# Altium PCB PELT_DRIVE.PcbDoc (part 2 of 2)
Units mm, origin at the board's own origin, x right, y up, seen from the top; angles counter-clockwise.
Board outline 100 x 36 mm, 2 copper layers (Top Layer, Bottom Layer), stack 1.071 mm thick; 61 components, 46 nets, 221 pads, 71 vias.
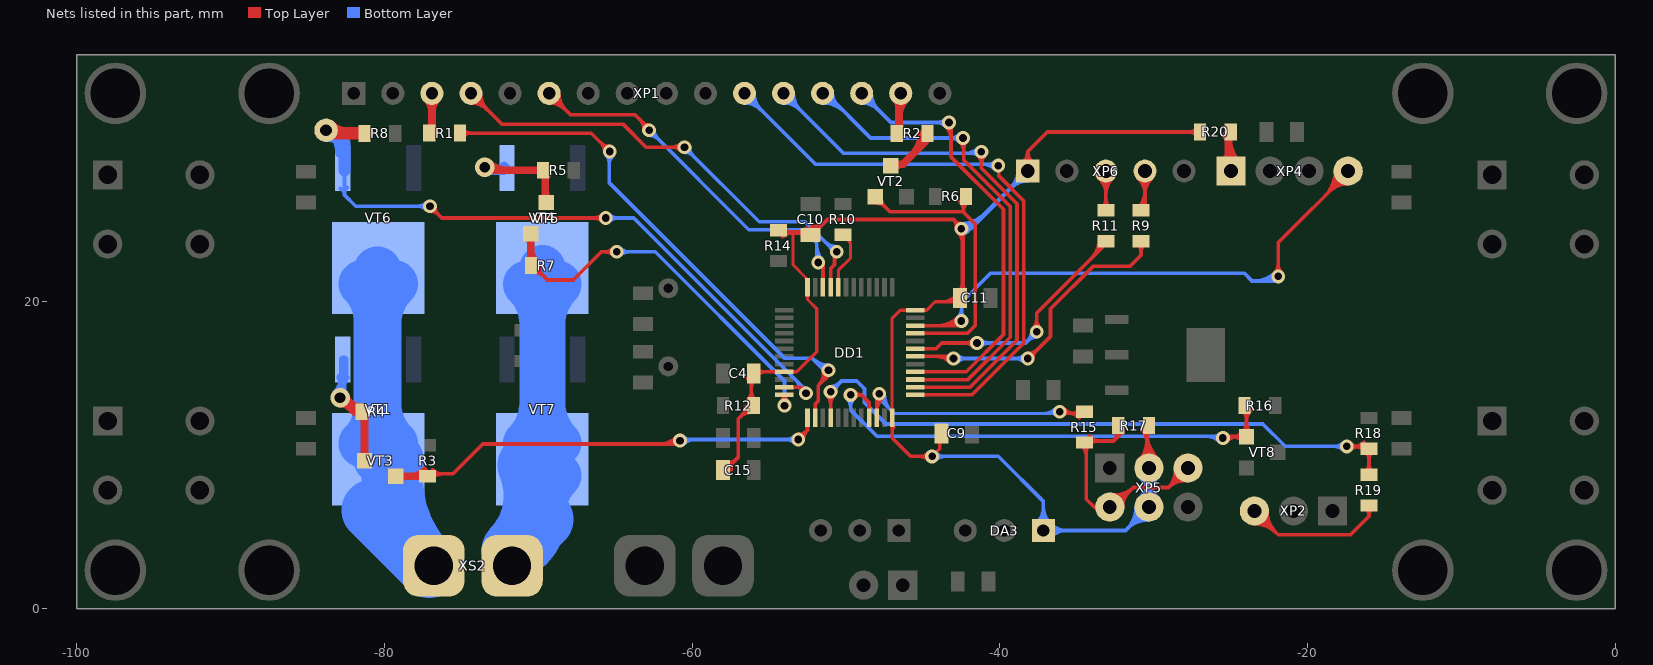
[diagram p2: the nets of this part, all layers, seen from the top]

## Via types
v1: diameter 0.9, hole 0.5, Top Layer to Bottom Layer, tented both sides, 65 vias
v2: diameter 1.27, hole 0.7, Top Layer to Bottom Layer, tented both sides, 5 vias
v3: diameter 2.6, hole 2, Top Layer to Bottom Layer, tented both sides, 1 vias

## Nets (pads, with @x,y where several pads share a name; then routed paths per layer and width w, separated by ;. In a path a pad name is that pad's centre, name@x,y a point inside that pad or via, vN(x,y) a via of type N, cw(c..) or ccw(c..) an arc to the next point about the centre after c; other vN are vias at no path point) (continued)
NetDD1_11: DD1.11 pad.0@-83.8,31.1 R8.1 VT6.1 | length 57.8
  Top Layer w0.24: v1@-77.046,25.832 cw(c-77.046,25.035) -76.483,25.599 cw(c-75.919,26.162) v1@-76.716,26.162 ; v1(-77.046,26.162) -76.284,25.4 -65.87,25.4 -65.616,25.654 v1(-65.616,25.4) ; v1@-65.849,25.167 ccw(c-66.413,24.603) -66.413,25.4 ccw(c-66.413,26.197) v1@-65.849,25.633 ; DD1.11@-54,14.4 -53,14.4 ; v1@-52.918,14.088 ccw(c-53.226,14.174) -53,14.4 ; v1@-52.688,14.318 cw(c-52.774,14.626) -53,14.4 ; v1(-52.6,14) -53,14.4
  Top Layer w0.8: pad.0@-83.6,30.9 R8.1@-81.15,30.9 ; pad.0@-83.544,31.356 ccw(c-82.443,32.457) -82.443,30.9
  Bottom Layer w0.24: VT6.1@-82.871,27.308 cw(c-83.07,26.882) -82.6,26.882 ; -82.6,27 cw(c-82.058,27) VT6.1@-82.441,27.383 ; VT6.1@-82.6,28.5 -82.6,26.89 -81.872,26.162 v1(-77.046,26.162) ; v1@-77.279,25.929 ccw(c-77.843,25.365) -77.843,26.162 ccw(c-77.843,26.959) v1@-77.279,26.395 ; v1(-65.616,25.4) -63.8,25.4 -52.6,14.2 v1(-52.6,14) ; v1@-65.383,25.167 cw(c-64.819,24.603) -64.819,25.4 cw(c-64.819,26.197) v1@-65.383,25.633 ; -53.305,14.905 cw(c-54.21,14) v1@-52.93,14 ; -52.895,14.495 cw(c-53.39,14) v1@-52.69,14 ; -52.822,14.422 ccw(c-52.6,14.644) v1@-52.6,14.33
  Bottom Layer w0.8: pad.0@-83.8,31.1 pad.0@-83.4,31.1 ; pad.0@-83.775,30.739 cw(c-83.669,29.232) -82.6,30.3 ; VT6.1@-82.81,29.653 ccw(c-84.825,29.675) pad.0@-83.4,31.1 ; VT6.1@-82.781,29.723 ccw(c-83.217,30.159) -82.6,30.159 ; VT6.1@-82.6,28.5 -82.6,30.3 pad.0@-83.4,31.1
NetDD1_12: DD1.12 R7.2 VT5.1 | length 32.9
  Top Layer w0.24: R7.2@-70.334,21.87 cw(c-70.334,20.832) -69.6,21.566 ; R7.2@-70.334,22.3 -69.404,21.37 -67.73,21.37 -65.9,23.2 v1(-64.9,23.2) ; -69.954,22.25 ccw(c-69.157,22.25) -69.721,21.687 ; v1@-65.133,22.967 ccw(c-65.697,22.403) -65.697,23.2 ccw(c-65.697,23.997) v1@-65.133,23.433 ; v1@-54.21,13.455 ccw(c-54.577,13.9) DD1.12@-54,13.9 ; v1(-54,13.2) DD1.12@-54,13.9 ; v1@-53.79,13.455 cw(c-53.423,13.9) DD1.12@-54,13.9
  Top Layer w0.5: VT5.1@-70.677,24.191 cw(c-71.104,23.764) -70.5,23.764 cw(c-69.896,23.764) VT5.1@-70.323,24.191 ; R7.2@-70.5,22.466 VT5.1@-70.5,24.368 ; -70.5,23.354 ccw(c-69.33,23.354) R7.2@-70.157,22.527
  Bottom Layer w0.24: v1@-64.667,22.967 cw(c-64.103,22.403) -64.103,23.2 cw(c-64.103,23.997) v1@-64.667,23.433 ; v1@-64.6,23.2 -62.4,23.2 -54,14.8 v1(-54,13.2) ; v1@-54.233,13.433 ccw(c-54.797,13.997) -54,13.997 ccw(c-53.203,13.997) v1@-53.767,13.433
NetDD1_13: DD1.13 R3.1 VT3.1 | length 37.6
  Top Layer w0.24: R3.1@-77.2,8.766 -75.549,8.766 -73.615,10.7 -61.09,10.7 v1@-60.79,11 ; R3.1@-76.881,8.497 cw(c-76.233,7.849) -76.233,8.766 cw(c-76.233,9.683) -76.881,9.035 ; -62.123,10.7 ccw(c-62.123,12.255) v1@-61.023,11.155 ; -61.543,10.7 ccw(c-61.543,11.675) v1@-60.854,10.986 ; v1(-53.1,11) -52.5,11.6 DD1.13@-52.5,12.4 ; v1@-53.1,11.33 ccw(c-53.1,12.127) -52.537,11.563 ccw(c-51.973,11) v1@-52.77,11
  Top Layer w0.5: VT3.1@-79.268,8.6 R3.1@-77.366,8.6 ; VT3.1@-79.091,8.423 cw(c-78.664,7.996) -78.664,8.6 cw(c-78.664,9.204) VT3.1@-79.091,8.777 ; -78.254,8.6 ccw(c-78.254,9.77) R3.1@-77.427,8.943
  Bottom Layer w0.24: v1@-60.79,11 v1(-53.1,11) ; v1@-60.557,10.689 cw(c-59.805,9.937) -59.805,11 ; v1@-60.557,11.155 ccw(c-60.182,11.53) -60.182,11 ; v1@-53.333,10.767 ccw(c-53.897,10.203) -53.897,11 ccw(c-53.897,11.797) v1@-53.333,11.233
  other v1: -60.79,10.922
NetDD1_14: DD1.14 R1.1 | length 42.5
  Top Layer w0.24: R1.1@-75.25,30.91 -66.554,30.91 v1(-65.362,29.718) v1@-65.282,29.718 ; R1.1@-74.981,30.641 cw(c-74.333,29.993) -74.333,30.91 cw(c-74.333,31.827) R1.1@-74.981,31.179 ; v1@-65.692,29.718 ccw(c-66.489,29.718) -65.925,30.281 ccw(c-65.362,30.845) v1@-65.362,30.048 ; DD1.14@-52,12.4 -52,13.3 -51.8,13.5 -51.8,14.5 -51.138,15.162 v1(-51.138,15.494) ; -51.8,14.5 ccw(c-52.625,15.325) v1@-51.466,15.457 ; -51.448,14.852 ccw(c-51.993,15.397) v1@-51.227,15.484
  Bottom Layer w0.24: v1@-65.595,29.485 cw(c-66.067,29.013) -65.4,29.013 ; -65.4,28.83 cw(c-64.474,28.83) v1@-65.129,29.485 ; v1(-65.362,29.718) -65.4,29.68 -65.4,27.7 -53.97,16.27 -52.17,16.27 v1@-51.39,15.49 ; -52.138,16.238 ccw(c-51.138,17.239) v1@-51.138,15.824 ; -51.729,15.829 ccw(c-51.138,16.419) v1@-51.138,15.584
NetDD1_21: DD1.21 R16.1 VT8.1 | length 42.6
  Top Layer w0.24: v1(-49.7,13.9) -49,13.9 ; v1@-49.445,13.69 cw(c-49,13.323) -49,13.9 ; v1@-49.445,14.11 ccw(c-49,14.477) -49,13.9 ; DD1.21@-48.5,12.4 -48.5,13.4 -49,13.9 ; v1@-25.5,11.2 -25.5,10.938 -25.238,11.2 -23.984,11.2 VT8.1@-23.96,11.176 -23.96,13.12 R16.1@-24.048,13.208 ; v1@-25.436,11.036 cw(c-25.041,10.641) -25.041,11.2 ; v1@-25.267,10.867 cw(c-24.462,10.062) -24.462,11.2 ; v1@-25.267,11.333 ccw(c-24.945,11.655) -24.945,11.2 ; -24.935,11.2 cw(c-24.935,10.201) VT8.1@-24.229,10.907 ; -24.819,11.2 ccw(c-24.819,12.035) -24.229,11.445 ccw(c-24.877,12.093) -23.96,12.093 ccw(c-23.043,12.093) VT8.1@-23.691,11.445 ; R16.1@-24.219,12.881 cw(c-24.843,12.257) -23.96,12.257 ; -23.96,12.208 cw(c-23.008,12.208) -23.681,12.881
  Bottom Layer w0.24: v1@-49.933,13.667 cw(c-50.497,13.103) -49.7,13.103 cw(c-48.903,13.103) v1@-49.467,13.667 ; v1(-49.7,13.9) -49.7,12.922 -47.978,11.2 -25.762,11.2 -25.5,10.938 v1@-25.5,11.2 ; -26.538,11.2 cw(c-26.538,10.062) v1@-25.733,10.867 ; -26.055,11.2 ccw(c-26.055,11.655) v1@-25.733,11.333 ; -25.959,11.2 cw(c-25.959,10.641) v1@-25.564,11.036
  other v1: -25.5,11.1
NetDD1_22: DD1.22 R15.2 | length 26.9
  Top Layer w0.2: v1@-48.084,13.723 cw(c-48.285,13.521) -48,13.521 ; DD1.22@-48,12.4 -48,13.806 v1(-47.836,13.97) ; DD1.22@-48,12.729 cw(c-46.595,12.729) v1@-47.589,13.723 ; -48,13.212 cw(c-47.078,13.212) v1@-47.73,13.864 ; v1(-36.1,12.8) -36.1,12.752 -36.152,12.7 -34.54,12.7 R15.2@-34.374,12.534 ; v1@-35.994,12.906 ccw(c-35.496,13.404) -35.496,12.7 ccw(c-35.496,12.196) v1@-35.853,12.553 ; v1@-35.853,13.047 ccw(c-35.014,13.886) R15.2@-35.014,12.7 ; -35.636,12.7 cw(c-35.636,11.564) -34.833,12.367 ; -35.395,12.7 ccw(c-35.395,13.495) R15.2@-34.833,12.933 ; -35.154,12.7 cw(c-35.154,12.046) R15.2@-34.691,12.509
  Bottom Layer w0.2: v1@-47.886,13.97 ccw(c-47.2,13.97) -47.685,13.485 ; v1(-47.836,13.97) -47.836,13.964 -48,13.8 -46.9,12.7 -36.152,12.7 -36.1,12.752 v1(-36.1,12.8) ; v1@-47.686,13.97 ccw(c-46.518,13.97) -47.344,13.144 ; v1@-47.486,13.97 ccw(c-45.835,13.97) -47.002,12.802 ; -37.186,12.7 ccw(c-37.186,13.886) v1@-36.348,13.047 ; v1@-36.348,12.553 ccw(c-36.704,12.196) -36.704,12.7 ccw(c-36.704,13.404) v1@-36.206,12.906
NetDD1_25: DD1.25 XP1.11 | length 44.6
  Top Layer w0.24: DD1.25@-45.5,13.9 -41.81,13.9 -38.438,17.272 -38.438,26.505 -40.06,28.127 v1@-40.06,28.7
  Bottom Layer w0.24: XP1.11@-56.6,32.87 cw(c-56.6,31.349) -55.525,32.424 cw(c-54.449,33.5) XP1.11@-55.97,33.5 ; XP1.11@-56.6,33.11 cw(c-56.6,32.168) -55.934,32.834 cw(c-55.268,33.5) XP1.11@-56.21,33.5 ; XP1.11@-56.6,33.5 -52,28.9 -40.2,28.9 v1(-40.1,28.8) ; -41.138,28.9 cw(c-41.138,27.762) v1@-40.333,28.567 ; -40.655,28.9 ccw(c-40.655,29.355) v1@-40.333,29.033 ; -40.559,28.9 cw(c-40.559,28.341) v1@-40.164,28.736
NetDD1_26: DD1.26 XP1.12 | length 42.4
  Top Layer w0.24: DD1.26@-45.5,14.4 -41.932,14.4 -38.878,17.454 -38.878,26.322 -41.2,28.644 v1(-41.2,29.7) ; v1@-41.433,29.467 cw(c-41.997,28.903) -41.2,28.903 cw(c-40.403,28.903) v1@-40.967,29.467
  Bottom Layer w0.24: XP1.12@-54.06,32.87 cw(c-54.06,31.349) -52.985,32.424 cw(c-51.909,33.5) XP1.12@-53.43,33.5 ; XP1.12@-54.06,33.11 cw(c-54.06,32.168) -53.394,32.834 cw(c-52.728,33.5) XP1.12@-53.67,33.5 ; XP1.12@-54.06,33.5 -50.16,29.6 -41.3,29.6 v1(-41.2,29.7) ; -42.238,29.6 ccw(c-42.238,30.738) v1@-41.433,29.933 ; -41.755,29.6 cw(c-41.755,29.145) v1@-41.433,29.467 ; -41.659,29.6 ccw(c-41.659,30.159) v1@-41.264,29.764
NetDD1_27: DD1.27 XP1.13 | length 38.9
  Top Layer w0.24: DD1.27@-45.5,14.9 -45.49,14.89 -42.065,14.89 -39.318,17.636 -39.318,26.14 -42.339,29.161 -42.339,30.539 v1(-42.4,30.6) ; v1@-42.633,30.367 cw(c-43.344,29.656) -42.339,29.656 ; -42.339,29.951 cw(c-41.751,29.951) v1@-42.167,30.367
  Bottom Layer w0.24: XP1.13@-51.52,32.87 cw(c-51.52,30.818) -50.069,32.269 ; XP1.13@-51.52,33.11 cw(c-51.52,31.637) -50.479,32.679 ; XP1.13@-51.52,33.35 cw(c-51.52,32.457) -50.888,33.088 ; XP1.13@-51.52,33.5 -51.3,33.5 -48.4,30.6 -42.7,30.6 -42.5,30.8 -42.4,30.7 v1(-42.4,30.6) ; XP1.13@-50.89,33.5 ccw(c-49.9,33.5) -50.6,32.8 ; v1@-42.633,30.367 ccw(c-43.197,29.803) -43.197,30.6 ccw(c-43.197,31.397) v1@-42.633,30.833
NetDD1_28: DD1.28 XP1.14 | length 35.3
  Top Layer w0.24: DD1.28@-45.5,15.4 -42.177,15.4 -39.758,17.819 -39.758,25.958 -43.17,29.37 -43.17,31.47 v1(-43.3,31.6) ; v1@-43.533,31.367 cw(c-44.411,30.489) -43.17,30.489 ; v1@-43.364,31.536 cw(c-43.831,31.069) -43.17,31.069 ; -43.17,31.117 cw(c-42.817,31.117) v1@-43.067,31.367
  Bottom Layer w0.24: XP1.14@-48.98,32.87 cw(c-48.98,31.349) -47.905,32.424 cw(c-46.829,33.5) XP1.14@-48.35,33.5 ; XP1.14@-48.98,33.11 cw(c-48.98,32.168) -48.314,32.834 cw(c-47.648,33.5) XP1.14@-48.59,33.5 ; XP1.14@-48.98,33.5 -47.08,31.6 v1(-43.3,31.6) ; v1@-43.533,31.367 ccw(c-44.097,30.803) -44.097,31.6 ccw(c-44.097,32.397) v1@-43.533,31.833
NetDD1_30: DD1.30 R9.2 | length 27
  Top Layer w0.24: DD1.30@-45.5,16.4 -43.4,16.4 -43.1,16.1 -43.01,16.19 v1(-43.01,16.256) ; -44.154,16.4 cw(c-44.154,15.112) v1@-43.243,16.023 ; -43.575,16.4 cw(c-43.575,15.691) v1@-43.074,16.192 ; -43.459,16.4 ccw(c-43.459,16.705) v1@-43.243,16.489 ; v1(-38.184,16.256) -38.144,16.256 -36.7,17.7 -36.7,19.5 -33.95,22.25 -31.55,22.25 -30.818,22.982 R9.2@-30.818,24.042 ; v1@-38.184,16.586 ccw(c-38.184,17.479) -37.552,16.848 ; v1@-37.854,16.256 cw(c-37.154,16.256) -37.649,16.751 ; R9.2@-31.087,23.773 cw(c-31.735,23.125) -30.818,23.125 cw(c-29.901,23.125) R9.2@-30.549,23.773
  Bottom Layer w0.24: v1@-43.1,16.1 -42.944,16.256 v1(-38.184,16.256) ; v1@-43.01,16.19 v1(-43.01,16.256) ; v1@-42.777,16.023 cw(c-42.213,15.459) -42.213,16.256 cw(c-42.213,17.053) v1@-42.777,16.489 ; v1@-38.417,16.023 ccw(c-38.981,15.459) -38.981,16.256 ccw(c-38.981,17.053) v1@-38.417,16.489
NetDD1_31: DD1.31 R11.2 | length 24.4
  Top Layer w0.24: DD1.31@-45.5,16.9 -44.144,16.9 -43.772,17.272 v1(-41.486,17.272) v1@-41.74,17.018 ; v1@-41.719,17.039 ccw(c-42.283,16.475) -42.283,17.272 ccw(c-42.283,18.069) v1@-41.719,17.505 ; v1@-37.833,18.233 ccw(c-38.397,18.797) -37.6,18.797 ccw(c-36.803,18.797) v1@-37.367,18.233 ; v1(-37.6,18) -37.6,19.222 -33.104,23.718 R11.2@-33.104,24.042 ; -34.067,22.755 ccw(c-35.354,24.042) R11.2@-33.534,24.042 ; -33.657,23.165 ccw(c-34.534,24.042) R11.2@-33.294,24.042
  Bottom Layer w0.24: v1@-41.74,17.018 v1(-41.486,17.272) -38.328,17.272 v1(-37.6,18) ; v1@-41.253,17.039 cw(c-40.689,16.475) -40.689,17.272 cw(c-40.689,18.069) v1@-41.253,17.505 ; v1@-37.93,18 cw(c-38.727,18) -38.163,17.437 cw(c-37.6,16.873) v1@-37.6,17.67
NetDD1_33: DD1.33 R6.2 VT2.1 | length 21.9
  Top Layer w0.24: VT2.1@-48.1,26.388 cw(c-48.1,25.471) -47.451,26.119 cw(c-46.803,26.768) VT2.1@-47.72,26.768 ; VT2.1@-48.1,26.768 -47.132,25.8 -42.35,25.8 ; DD1.33@-45.5,17.9 -42.1,17.9 -41.6,18.4 -41.6,25.006 -42.35,25.756 R6.2@-42.35,26.8 ; -42.619,26.481 cw(c-43.267,25.833) -42.35,25.833 cw(c-41.433,25.833) R6.2@-42.081,26.481
NetDD1_34: DD1.34 XP4.4 | length 49.6
  Top Layer w0.24: DD1.34@-45.5,18.4 -42.9,18.4 ; -44.021,18.4 ccw(c-44.021,20.221) v1@-42.733,18.933 ; -43.442,18.4 ccw(c-43.442,19.642) v1@-42.564,18.764 ; -42.862,18.4 ccw(c-42.862,19.062) v1@-42.394,18.594 ; v1@-42.825,18.641 cw(c-43.092,18.592) -42.9,18.4 ; v1@-42.68,18.423 ccw(c-42.776,18.275) -42.9,18.4 ; v1(-42.5,18.7) -42.6,18.7 -42.9,18.4 ; v1@-22.133,21.833 ccw(c-22.697,22.397) -21.9,22.397 ccw(c-21.103,22.397) v1@-21.667,21.833 ; v1(-21.9,21.6) -21.9,23.8 -17.356,28.344 XP4.4@-17.356,28.448 ; -18.846,26.854 ccw(c-20.441,28.448) XP4.4@-18.186,28.448 ; -18.595,27.105 cw(c-17.356,25.865) XP4.4@-17.356,27.618 ; -18.437,27.263 ccw(c-19.621,28.448) XP4.4@-17.946,28.448 ; -18.186,27.514 cw(c-17.356,26.685) XP4.4@-17.356,27.858 ; -18.027,27.673 ccw(c-18.802,28.448) XP4.4@-17.706,28.448
  Bottom Layer w0.24: v1@-42.71,18.955 ccw(c-43.077,19.4) -42.5,19.4 ; v1(-42.5,18.7) -42.5,19.4 ; v1@-42.29,18.955 cw(c-41.923,19.4) -42.5,19.4 ; -23.421,21.3 ccw(c-23.421,23.121) v1@-22.133,21.833 ; -22.842,21.3 ccw(c-22.842,22.542) v1@-21.964,21.664 ; -22.262,21.3 ccw(c-22.262,21.962) v1@-21.794,21.494 ; v1(-21.9,21.6) -22.2,21.3 -23.6,21.3 -24.1,21.8 -40.6,21.8 -42.481,19.919 -42.481,19.419 -42.5,19.4
NetDD1_44: DD1.44 R10.1 | length 5.3
  Top Layer w0.2: DD1.44@-50.5,20.9 -50.5,21.994 -49.7,22.794 -49.7,23.761 ; R10.1@-50.2,24.45 -49.85,24.45 -49.8,24.5 -49.8,23.861 ; R10.1@-49.827,24.214 ccw(c-49.608,24.053) -49.8,23.861 ; R10.1@-49.789,24.278 ccw(c-49.379,24.082) -49.7,23.761 ; -49.8,23.861 -49.7,23.761
NetDD1_45: DD1.45 XP1.4 | length 38.4
  Top Layer w0.24: XP1.4@-74.38,32.87 cw(c-74.38,31.349) -73.305,32.424 cw(c-72.229,33.5) XP1.4@-73.75,33.5 ; XP1.4@-74.38,33.11 cw(c-74.38,32.168) -73.714,32.834 cw(c-73.048,33.5) XP1.4@-73.99,33.5 ; XP1.4@-74.38,33.5 -72.38,31.5 -64.5,31.5 -63,30 v1(-60.5,30) ; v1@-60.733,29.767 ccw(c-61.297,29.203) -61.297,30 ccw(c-61.297,30.797) v1@-60.733,30.233 ; DD1.45@-51,20.9 -51,22.1 -50.75,22.35 v1@-50.75,22.8 ; v1@-50.6,23.1 v1(-50.6,23.2)
  Bottom Layer w0.24: v1@-60.5,29.67 cw(c-60.5,28.873) -59.937,29.437 cw(c-59.373,30) v1@-60.17,30 ; v1(-60.5,30) -55.646,25.146 -52.662,25.146 -50.746,23.23 -50.63,23.23 -50.4,23 -50.5,23 -50.6,23.1 v1(-50.6,23.2) ; -51.361,23.845 ccw(c-50.6,24.607) v1@-50.6,23.53 ; -51.081,23.565 cw(c-51.447,23.2) v1@-50.93,23.2
NetDD1_46: DD1.46 XP1.6 | length 33.3
  Top Layer w0.24: XP1.6@-69.3,32.87 cw(c-69.3,31.349) -68.225,32.424 cw(c-67.149,33.5) XP1.6@-68.67,33.5 ; XP1.6@-69.3,33.11 cw(c-69.3,32.168) -68.634,32.834 cw(c-67.968,33.5) XP1.6@-68.91,33.5 ; XP1.6@-69.3,33.5 -67.9,32.1 -63.7,32.1 v1@-62.55,30.95 ; -63.434,31.834 cw(c-64.168,31.1) v1@-63.13,31.1 ; -63.193,31.593 ccw(c-62.8,31.985) v1@-62.8,31.43 ; v1(-51.8,22.5) -51.62,22.5 -51.5,22.38 DD1.46@-51.5,20.9
  Bottom Layer w0.24: v1@-62.8,30.77 cw(c-62.8,29.92) -62.199,30.521 ; v1(-62.8,31.1) -62.778,31.1 -56.316,24.638 -52.776,24.638 -51.9,23.762 -51.9,22.74 -51.6,22.44 -51.74,22.44 v1(-51.8,22.5) ; v1@-62.47,31.1 ccw(c-61.727,31.1) -62.252,30.575 ; v1@-52.033,22.733 ccw(c-52.355,23.055) -51.9,23.055 ; -51.9,22.959 ccw(c-51.341,22.959) v1@-51.736,22.564 ; -51.9,23.538 ccw(c-50.762,23.538) v1@-51.567,22.733
NetR1_2: R1.2 XP1.3 | length 5.4
  Top Layer w0.5: XP1.3@-77.274,33.146 cw(c-78.127,32.293) -76.92,32.293 cw(c-75.713,32.293) XP1.3@-76.566,33.146 ; R1.2@-77.127,31.137 ccw(c-77.626,31.636) -76.92,31.636 ; R1.2@-76.92,30.94 XP1.3@-76.92,33.5 ; -76.92,31.491 ccw(c-76.419,31.491) R1.2@-76.773,31.137
NetR2_1: R2.1 VT2.3 | length 5.4
  Top Layer w0.5: VT2.3@-46.984,28.9 -46.3,28.9 ; VT2.3@-46.898,28.633 cw(c-46.3,28.097) -46.3,28.9 ; -45.63,29.57 ccw(c-46.911,30.85) R2.1@-45.1,30.85 ; R2.1@-44.85,30.9 -44.85,30.35 -46.3,28.9
NetR2_2: R2.2 XP1.15 | length 5.3
  Top Layer w0.5: XP1.15@-46.794,33.146 cw(c-47.381,32.559) -46.55,32.559 ; R2.2@-46.727,31.127 ccw(c-47.154,31.554) -46.55,31.554 ccw(c-45.946,31.554) R2.2@-46.373,31.127 ; R2.2@-46.55,30.9 XP1.15@-46.55,33.39 ; -46.55,32.027 cw(c-44.967,32.027) XP1.15@-46.086,33.146
NetR4_2: R4.2 VT1.1 VT3.3 | length 18.9
  Top Layer w0.5: v2@-82.888,13.331 cw(c-82.888,12.402) -82.231,13.059 cw(c-81.574,13.716) v2@-82.503,13.716 ; v2@-82.788,13.344 cw(c-82.548,12.446) -82.083,13.251 cw(c-81.618,14.056) v2@-82.516,13.816 ; -82.059,12.887 ccw(c-81.365,13.581) R4.2@-81.345,12.6 ; R4.2@-81.527,12.573 cw(c-82.074,12.026) -81.3,12.026 ; R4.2@-81.527,12.623 ccw(c-81.954,12.196) -81.954,12.8 ccw(c-81.954,13.404) R4.2@-81.527,12.977 ; VT3.3@-81.477,9.793 ccw(c-81.904,10.22) -81.3,10.22 ccw(c-80.696,10.22) VT3.3@-81.123,9.793 ; R4.2@-81.355,13.1 cw(c-81.4,15.204) v2(-82.888,13.716) -81.972,12.8 R4.2@-81.35,12.8 ; VT3.3@-81.3,9.616 R4.2@-81.3,12.75
  Bottom Layer w0.5: v2@-83.16,13.988 ccw(c-84.247,15.075) VT1.1@-82.71,15.075 ; v2(-82.888,13.716) -82.71,13.894 VT1.1@-82.71,16.206 ; VT1.1@-82.887,15.029 cw(c-83.314,14.602) -82.71,14.602 cw(c-82.106,14.602) VT1.1@-82.533,15.029 ; VT1.1@-82.6,15 VT1.1@-82.6,16.2
NetR5_1: R5.1 VT4.1 VT5.3 | length 14.6
  Top Layer w0.5: v2@-73.744,28.448 v2(-73.49,28.702) ; v2@-73.692,28.5 -69.55,28.5 VT5.3@-69.55,26.466 ; v2@-73.218,28.974 ccw(c-72.073,30.119) -72.073,28.5 ; R5.1@-69.727,28.273 cw(c-70.154,27.846) -69.55,27.846 cw(c-68.946,27.846) R5.1@-69.373,28.273 ; R5.1@-69.727,28.323 ccw(c-70.154,27.896) -70.154,28.5 ccw(c-70.154,29.104) R5.1@-69.727,28.677 ; -69.55,27.163 ccw(c-68.721,27.163) VT5.3@-69.307,26.577
  Bottom Layer w0.5: v2(-73.49,28.702) -73.744,28.448 VT4.1@-72.246,28.448 ; v2@-73.177,28.926 ccw(c-72.246,29.593) VT4.1@-72.246,28.448 ; v2@-73.138,28.448 ccw(c-73.138,29.748) VT4.1@-72.219,28.829 ; VT4.1@-72.042,28.652 VT4.1@-72.246,28.448
NetR9_1: R9.1 XP6.4 | length 8.8
  Top Layer w0.24: R9.1@-31.037,26.011 ccw(c-32.178,27.152) -30.564,27.152 ; XP6.4@-31.009,28.003 cw(c-32.085,26.927) -30.564,26.927 cw(c-29.043,26.927) XP6.4@-30.119,28.003 ; R9.1@-30.867,25.841 ccw(c-31.599,26.573) -30.564,26.573 ; XP6.4@-30.84,28.172 cw(c-31.506,27.506) -30.564,27.506 cw(c-29.622,27.506) XP6.4@-30.288,28.172 ; R9.1@-30.818,25.742 -30.564,25.996 XP6.4@-30.564,28.448
NetR11_1: R11.1 XP6.3 | length 8
  Top Layer w0.24: XP6.3@-33.549,28.003 cw(c-34.625,26.927) -33.104,26.927 cw(c-31.583,26.927) XP6.3@-32.659,28.003 ; XP6.3@-33.38,28.172 cw(c-34.046,27.507) -33.104,27.507 cw(c-32.162,27.506) XP6.3@-32.828,28.172 ; R11.1@-33.373,26.011 ccw(c-34.021,26.659) -33.104,26.659 ccw(c-32.187,26.659) R11.1@-32.835,26.011 ; R11.1@-33.104,25.742 XP6.3@-33.104,28.448
NetR15_1: R15.1 R17.1 XP5.2 XP5.5 | length 29.9
  Top Layer w0.24: R15.1@-34.719,10.681 cw(c-35.551,9.849) -34.374,9.849 ; R15.1@-34.549,10.851 cw(c-34.971,10.429) R15.1@-34.374,10.429 ; -34.374,10.216 cw(c-33.716,10.216) -34.181,10.681 cw(c-33.653,10.153) -33.653,10.9 ; -34.181,11.219 ccw(c-33.412,11.988) -33.412,10.9 ; XP5.2@-33.663,6.438 ccw(c-33.866,6.397) -33.866,6.604 ; XP5.2@-33.663,6.77 cw(c-33.866,6.811) -33.866,6.604 ; XP5.2@-32.794,6.95 ccw(c-32.647,7.866) -31.99,7.21 ; XP5.2@-32.756,7.186 ccw(c-32.555,8.439) -31.658,7.542 ; XP5.2@-32.718,7.423 ccw(c-32.463,9.011) -31.326,7.874 ; R17.1@-32.485,11.671 cw(c-33.063,11.363) -32.6,10.9 ; -32.371,11.129 ccw(c-32.764,11.522) R17.1@-32.274,11.784 ; XP5.2@-32.26,6.604 cw(c-31.449,6.604) -32.022,7.178 ; R17.1@-32.15,11.9 -32.15,11.35 -32.6,10.9 ; XP5.2@-32.02,6.604 cw(c-30.629,6.604) -31.613,7.587 ; XP5.5@-28.597,9.077 cw(c-30.12,8.955) -29.04,7.874 ; XP5.5@-28.358,9.097 cw(c-29.441,9.009) -28.673,8.241 cw(c-27.905,7.473) XP5.5@-27.817,8.556 ; XP5.5@-27.837,8.317 ccw(c-27.959,6.794) -29.04,7.874 ; XP5.5@-27.77,9.144 -29.04,7.874 ; -33.866,6.604 XP5.2@-32.85,6.604 -32.596,6.604 -31.326,7.874 ; -33.866,6.604 -34.374,7.112 -34.374,10.9 -32.6,10.9 ; -31.326,7.874 -29.04,7.874
NetR19_1: R19.1 XP2.3 | length 16.1
  Top Layer w0.24: XP2.3@-23.452,5.52 cw(c-23.452,3.516) -22.035,4.933 cw(c-20.618,6.35) XP2.3@-22.622,6.35 ; XP2.3@-23.452,5.76 cw(c-23.452,4.336) -22.445,5.343 cw(c-21.438,6.35) XP2.3@-22.862,6.35 ; XP2.3@-23.452,6.35 -21.902,4.8 -17.2,4.8 -16,6 ; R19.1@-16.253,6.567 cw(c-16.761,6) -16,6 ; R19.1@-16,6.85 -16,6 ; R19.1@-15.747,6.567 ccw(c-15.239,6) -16,6
NetR20_1: R20.1 XP4.1 | length 6
  Top Layer w0.5: XP4.1@-25.471,28.943 ccw(c-26.265,29.737) -25.142,29.737 ; R20.1@-25.319,30.761 cw(c-25.746,30.334) -25.142,30.334 cw(c-24.538,30.334) R20.1@-24.965,30.761 ; XP4.1@-25.142,28.614 R20.1@-25.142,30.988 ; R20.1@-25.142,30.539 ccw(c-22.885,30.539) XP4.1@-24.481,28.943
NetVT1_2: VT1.2 VT6.2 XS2.1 | length 36
  Bottom Layer w3.1: VT1.2@-81.435,10.731 ccw(c-83.804,13.1) -80.454,13.1 ; VT6.2@-81.435,21.127 cw(c-83.804,18.758) -80.454,18.758 ; VT1.2@-80.454,9.7 VT6.2@-80.454,22 ; -80.454,13.313 ccw(c-76.803,13.313) VT1.2@-79.385,10.731 ; -80.454,18.545 cw(c-76.803,18.545) VT6.2@-79.385,21.127
  Bottom Layer w4: -80.803,6.403 -77.1,2.7 cw(c-71.324,8.476) VT1.2@-79.419,9.572
NetVT4_2: VT4.2 VT7.2 XS2.2 | length 59.1
  Bottom Layer w2.54: XS2.2@-71.712,3.1 XS2.2@-71.1,3.1 ; XS2.2@-71.1,2.7 XS2.2@-71.1,2.8
  Bottom Layer w3: XS2.2@-72.066,3.148 ccw(c-77.675,8.757) VT7.2@-69.742,8.757 ; XS2.2@-71.81,3.284 ccw(c-72.313,5.806) -69.742,5.806 VT4.2@-69.742,22.152 ; XS2.2@-71.712,3.1 XS2.2@-71.712,3.81 ; VT7.2@-71.041,8.956 cw(c-74.903,6.726) -70.596,5.572 ; VT7.2@-70.803,8.645 cw(c-73.363,6.085) -69.742,6.085 cw(c-66.121,6.085) VT7.2@-68.681,8.645 ; VT7.2@-70.803,10.767 ccw(c-73.363,13.327) -69.742,13.327 ccw(c-66.121,13.327) VT7.2@-68.681,10.767 ; VT4.2@-70.803,21.091 cw(c-73.363,18.531) -69.742,18.531 cw(c-66.121,18.531) VT4.2@-68.681,21.091 ; VT7.2@-70.289,6.717 cw(c-67.601,5.997) VT7.2@-68.992,8.407
  Bottom Layer w4: VT7.2@-70.66,9.31 cw(c-75.236,7.334) -71.712,3.81 -69.716,5.806
SENS: DD1.16 R18.2 R19.2 | length 50.6
  Top Layer w0.24: v1@-51.233,13.867 cw(c-51.797,13.303) -51,13.303 cw(c-50.203,13.303) v1@-50.767,13.867 ; DD1.16@-51,12.4 v1(-51,14.1) ; v1(-17.45,10.55) -16,10.55 R19.2@-16,8.55 ; v1@-17.217,10.317 cw(c-16.653,9.753) -16.653,10.55 cw(c-16.653,11.347) v1@-17.217,10.783 ; R18.2@-16.319,10.281 ccw(c-16.967,9.633) -16.967,10.55 ccw(c-16.967,11.467) -16.319,10.819 ; R19.2@-16.269,8.819 ccw(c-16.917,9.467) -16,9.467 ccw(c-15.083,9.467) R19.2@-15.731,8.819 ; R18.2@-16.269,10.281 cw(c-16.917,9.633) -16,9.633 cw(c-15.083,9.633) R18.2@-15.731,10.281
  Bottom Layer w0.24: v1(-51,14.1) -50.3,14.8 -49.3,14.8 -48.8,14.3 -48.8,13.4 -47.4,12 -22.9,12 -21.45,10.55 v1(-17.45,10.55) ; v1@-51,14.43 ccw(c-51,15.227) -50.437,14.663 ccw(c-49.873,14.1) v1@-50.67,14.1 ; v1@-17.683,10.317 ccw(c-18.247,9.753) -18.247,10.55 ccw(c-18.247,11.347) v1@-17.683,10.783
VCC: C4.2 C9.2 C10.2 C11.2 C15.2 DA3.1 DD1.9 DD1.24 DD1.36 DD1.48 R12.2 R14.2 R17.2 R20.2 XP5.3 XP5.4 XP6.1 | length 171.7
  Top Layer w0.2: C4.2@-56.009,15.209 cw(c-55.547,14.747) -55.547,15.4 ; C4.2@-55.867,15.067 cw(c-55.064,14.264) -55.064,15.4 ; C4.2@-55.867,15.633 ccw(c-55.305,16.195) -55.305,15.4 ; C4.2@-55.75,15.4 DD1.9@-54,15.4 ; DD1.9@-53.95,15.45 -53.9,15.4 -53.2,15.4 -51.9,16.7 -51.9,19.5 -52.5,20.1 DD1.48@-52.5,20.9 -52.5,21.4 -53.45,22.35 -53.45,24.3 -53.3,24.45 ; -52.621,21.521 cw(c-52.791,21.35) DD1.48@-52.55,21.35 ; DD1.24@-47,12.4 -47,18.87 -46.47,19.4 DD1.36@-45.5,19.4 -44.761,19.4 -44.211,19.95 C11.2@-42.4,19.95 ; -43.899,19.95 ccw(c-43.899,21.598) C11.2@-42.733,20.433 ; -43.416,19.95 ccw(c-43.416,21.116) C11.2@-42.591,20.291 ; C11.2@-42.933,19.95 cw(c-42.933,19.667) C11.2@-42.733,19.867 ; C11.2@-42.933,19.95 ccw(c-42.933,20.633) C11.2@-42.45,20.15
  Top Layer w0.24: C15.2@-57.85,9 -57.05,9.8 -57,9.8 -57,12.35 -56.15,13.2 C4.2@-56.15,15.3 ; C15.2@-57.85,9.43 ccw(c-57.85,10.468) -57.116,9.734 ; -57.47,9.05 cw(c-56.673,9.05) -57.237,9.613 ; -56.884,12.466 cw(c-56.15,11.732) R12.2@-56.15,12.77 ; -56.763,12.587 ccw(c-57.327,13.15) -56.53,13.15 ; -56.419,13.519 ccw(c-57.067,14.167) -56.15,14.167 ccw(c-55.233,14.167) R12.2@-55.881,13.519 ; C4.2@-56.419,14.981 cw(c-57.067,14.333) -56.15,14.333 cw(c-55.233,14.333) C4.2@-55.881,14.981 ; C10.2@-52.3,24.45 -52.05,24.45 -51.2,25.3 -43,25.3 ; C10.2@-52.25,24.59 ccw(c-52.25,25.411) -51.67,24.83 ; -52.25,24.83 ccw(c-52.25,26.23) -51.26,25.24 ; C10.2@-51.87,24.45 cw(c-51.435,24.45) -51.743,24.757 ; DD1.24@-47,12.4 -47,11.1 -46.132,10.232 -45.8,9.9 v1(-44.4,9.9) -43.9,10.4 C9.2@-43.9,11.4 ; DD1.24@-46.97,11.95 ccw(c-46.69,11.95) -46.888,11.752 ; -44.956,9.86 ccw(c-45.069,10.29) v1@-44.685,10.066 ; -44.955,9.945 cw(c-45.072,9.516) v1@-44.687,9.736 ; v1@-44.634,9.668 ccw(c-45.2,9.107) -45.197,9.904 ccw(c-45.193,10.7) v1@-44.632,10.134 ; -42.893,25.193 ccw(c-42.5,25.585) v1@-42.5,25.03 ; v1@-42.825,24.755 ccw(c-43.442,24.858) -43,25.3 ; v1@-42.6,24.9 -43,25.3 ; XP6.1@-38.565,28.95 ccw(c-39.149,29.718) -38.184,29.718 ; XP6.1@-38.42,28.759 ccw(c-38.781,29.234) -38.184,29.234 ccw(c-37.587,29.234) XP6.1@-37.948,28.759 ; XP6.1@-38.184,28.448 -38.184,29.718 ; XP6.1@-37.803,28.95 cw(c-37.219,29.718) -38.184,29.718 ; XP5.3@-30.897,9.731 ccw(c-31.976,10.81) -30.45,10.81 ; XP5.3@-30.727,9.561 ccw(c-31.396,10.23) -30.45,10.23 ; -30.719,11.581 cw(c-31.367,10.933) -30.45,10.933 cw(c-29.533,10.933) R17.2@-30.181,11.581 ; XP5.3@-30.45,9.284 R17.2@-30.45,11.9 ; -30.45,10.327 ccw(c-29.127,10.327) XP5.3@-30.063,9.391 ; -30.45,10.906 ccw(c-28.548,10.906) XP5.3@-29.893,9.561 ; R17.2@-30.45,11.486 ccw(c-27.968,11.486) XP5.3@-29.723,9.731 ; R20.2@-27.111,30.719 ccw(c-27.759,30.071) -27.759,30.988 ccw(c-27.759,31.905) R20.2@-27.111,31.257 ; R20.2@-26.842,30.988 -36.914,30.988 -38.184,29.718
  Top Layer w0.3: R14.2@-54.4,24.45 -53.3,24.45 C10.2@-52.3,24.45 ; R14.2@-54.103,24.203 cw(c-53.505,23.605) -53.505,24.45 cw(c-53.505,25.295) R14.2@-54.103,24.697 ; C10.2@-52.597,24.203 ccw(c-53.195,23.605) -53.195,24.45 ccw(c-53.195,25.295) C10.2@-52.597,24.697 ; v1@-42.712,24.488 cw(c-43.466,23.734) -42.4,23.734 ; C11.2@-42.698,20.497 ccw(c-43.416,21.216) -42.4,21.216 ; v1@-42.6,24.9 -42.5,24.9 -42.4,24.8 C11.2@-42.4,19.95 ; -42.4,20.974 ccw(c-41.726,20.974) C11.2@-42.203,20.497 ; -42.4,24.217 cw(c-42.017,24.217) v1@-42.288,24.488
  Bottom Layer w0.2: XP5.4@-30.911,7.205 ccw(c-32.362,8.656) -30.31,8.656 ccw(c-28.258,8.656) XP5.4@-29.709,7.205 ; XP5.3@-30.911,8.543 cw(c-32.362,7.092) -30.31,7.092 cw(c-28.258,7.092) XP5.3@-29.709,8.543 ; XP5.4@-30.77,7.064 ccw(c-31.879,8.173) -30.31,8.173 ccw(c-28.741,8.173) XP5.4@-29.85,7.064 ; XP5.3@-30.77,8.684 cw(c-31.879,7.575) -30.31,7.575 cw(c-28.741,7.575) XP5.3@-29.85,8.684 ; XP5.3@-30.758,8.422 cw(c-31.034,7.977) -30.528,7.841 cw(c-29.846,7.659) XP5.3@-30.057,8.333 ; XP5.3@-30.653,8.592 cw(c-30.886,8.216) -30.459,8.101 ; XP5.4@-30.628,6.922 ccw(c-31.396,7.69) -30.31,7.69 ccw(c-29.224,7.69) XP5.4@-29.992,6.922 ; XP5.3@-30.628,8.826 cw(c-31.396,8.058) -30.31,8.058 cw(c-29.224,8.058) XP5.3@-29.992,8.826 ; XP5.3@-30.563,8.333 cw(c-30.774,7.659) -30.092,7.841 cw(c-29.586,7.977) XP5.3@-29.862,8.422 ; XP5.3@-30.504,8.524 cw(c-30.646,8.069) -30.186,8.192 ; -30.434,8.192 cw(c-29.974,8.069) XP5.3@-30.116,8.524 ; XP5.4@-30.31,6.604 XP5.3@-30.31,9.144 ; -30.161,8.101 cw(c-29.734,8.216) XP5.3@-29.967,8.592
  Bottom Layer w0.24: v1(-44.4,9.9) -40.1,9.9 -37.168,6.968 DA3.1@-37.168,5.08 -31.834,5.08 XP5.4@-30.31,6.604 ; v1@-44.167,9.667 cw(c-43.603,9.103) -43.603,9.9 cw(c-43.603,10.697) v1@-44.167,10.133 ; DA3.1@-37.613,5.525 ccw(c-38.689,6.601) -37.168,6.601 ccw(c-35.647,6.601) -36.723,5.525 ccw(c-35.647,6.601) -35.647,5.08 ccw(c-35.647,3.559) DA3.1@-36.723,4.635 ; DA3.1@-37.444,5.356 ccw(c-38.11,6.022) -37.168,6.022 ccw(c-36.226,6.022) -36.892,5.356 ccw(c-36.226,6.022) -36.226,5.08 ccw(c-36.226,4.138) DA3.1@-36.892,4.804 ; XP5.4@-31.14,6.604 cw(c-33.144,6.604) -31.727,5.187 cw(c-30.31,3.77) XP5.4@-30.31,5.774 ; XP5.4@-30.9,6.604 cw(c-32.324,6.604) -31.317,5.597 cw(c-30.31,4.59) XP5.4@-30.31,6.014
  Bottom Layer w0.3: v1@-42.6,24.7 -41.932,24.7 ; v1@-42.5,24.4 ccw(c-42.5,25.047) -42.043,24.589 ; v1@-42.5,25 ccw(c-42.5,27.096) -41.018,25.614 ; -41.53,25.102 cw(c-42.5,26.071) v1(-42.5,24.7) -41.932,24.7 ; XP6.1@-38.784,28.448 cw(c-40.233,28.448) -39.208,27.424 cw(c-38.184,26.4) XP6.1@-38.184,27.848 ; XP6.1@-38.438,28.194 -41.932,24.7 ; -41.932,24.7 ccw(c-41.932,24.312) -42.252,24.531 cw(c-41.932,24.312) -41.932,24.7 ; -41.932,24.7 cw(c-41.932,25.088) -42.252,24.869 ccw(c-41.932,25.088) -41.932,24.7
pads on no net: DD1.2 DD1.3 DD1.4 DD1.15 DD1.17 DD1.19 DD1.29 DD1.32 DD1.38 DD1.41 DD1.42 DD1.43 XP6.2

## Polygon pours and split planes (outlines as drawn)
GND on Bottom Layer "Bottom-GND" (solid, remove dead copper, pour order 4): -99.9,0 -99.9,36 -0.1,36 -0.1,0
GND on Top Layer "Top Layer-GND" (solid, remove dead copper, pour order 2): -100,0 -100,36 -0.1,36 -0.1,0

## Other copper
Top Layer:
  rectangle net +12V: -31,14.3 -2,20.9
  rectangle net +12V: -33.6,15.6 -20.9,17.4

## Silkscreen, mask and mechanical layers (free items; w line width, h text height)
Top Overlay:
  circle w0.254: c-54.3,21.2 r0.2
Bottom Overlay:
  circle w0.254: c-17.1,3.4 r0.141
  circle w0.254: c-16.2,3.4 r0.141
  lines w0.1: -19.4,2 -17.8,2 ; -19.4,3.8 -17.8,3.8 ; -18.4,1.7 -18.2,1.7 ; -18.4,4.1 -18.2,4.1 ; -18.3,4 -18.3,4.2
  lines w0.254: -17.45,2.9 ccw(c-16.65,2.9) -15.85,2.9 ; -17.8,1.8 -15.5,1.8 -15.5,4 -17.8,4 -17.8,1.8
  text "PeltierDrive v.1.0" at -19.7,2 h3
  text "Designed by Pinus pinus@wow-only.ru" at -15.2,0.5 h0.8
Mechanical 1:
  the board outline again, w0.1